# Altium PCB waku-ctl.PcbDoc (part 1 of 5)
Units mil, origin at the board's own origin, x right, y up, seen from the top; angles counter-clockwise.
Board outline 3530 x 2610 mil, 2 copper layers (Top Layer, Bottom Layer); 84 components, 84 nets, 358 pads, 106 vias.
Unrouted connection lines stored in the file: 42.
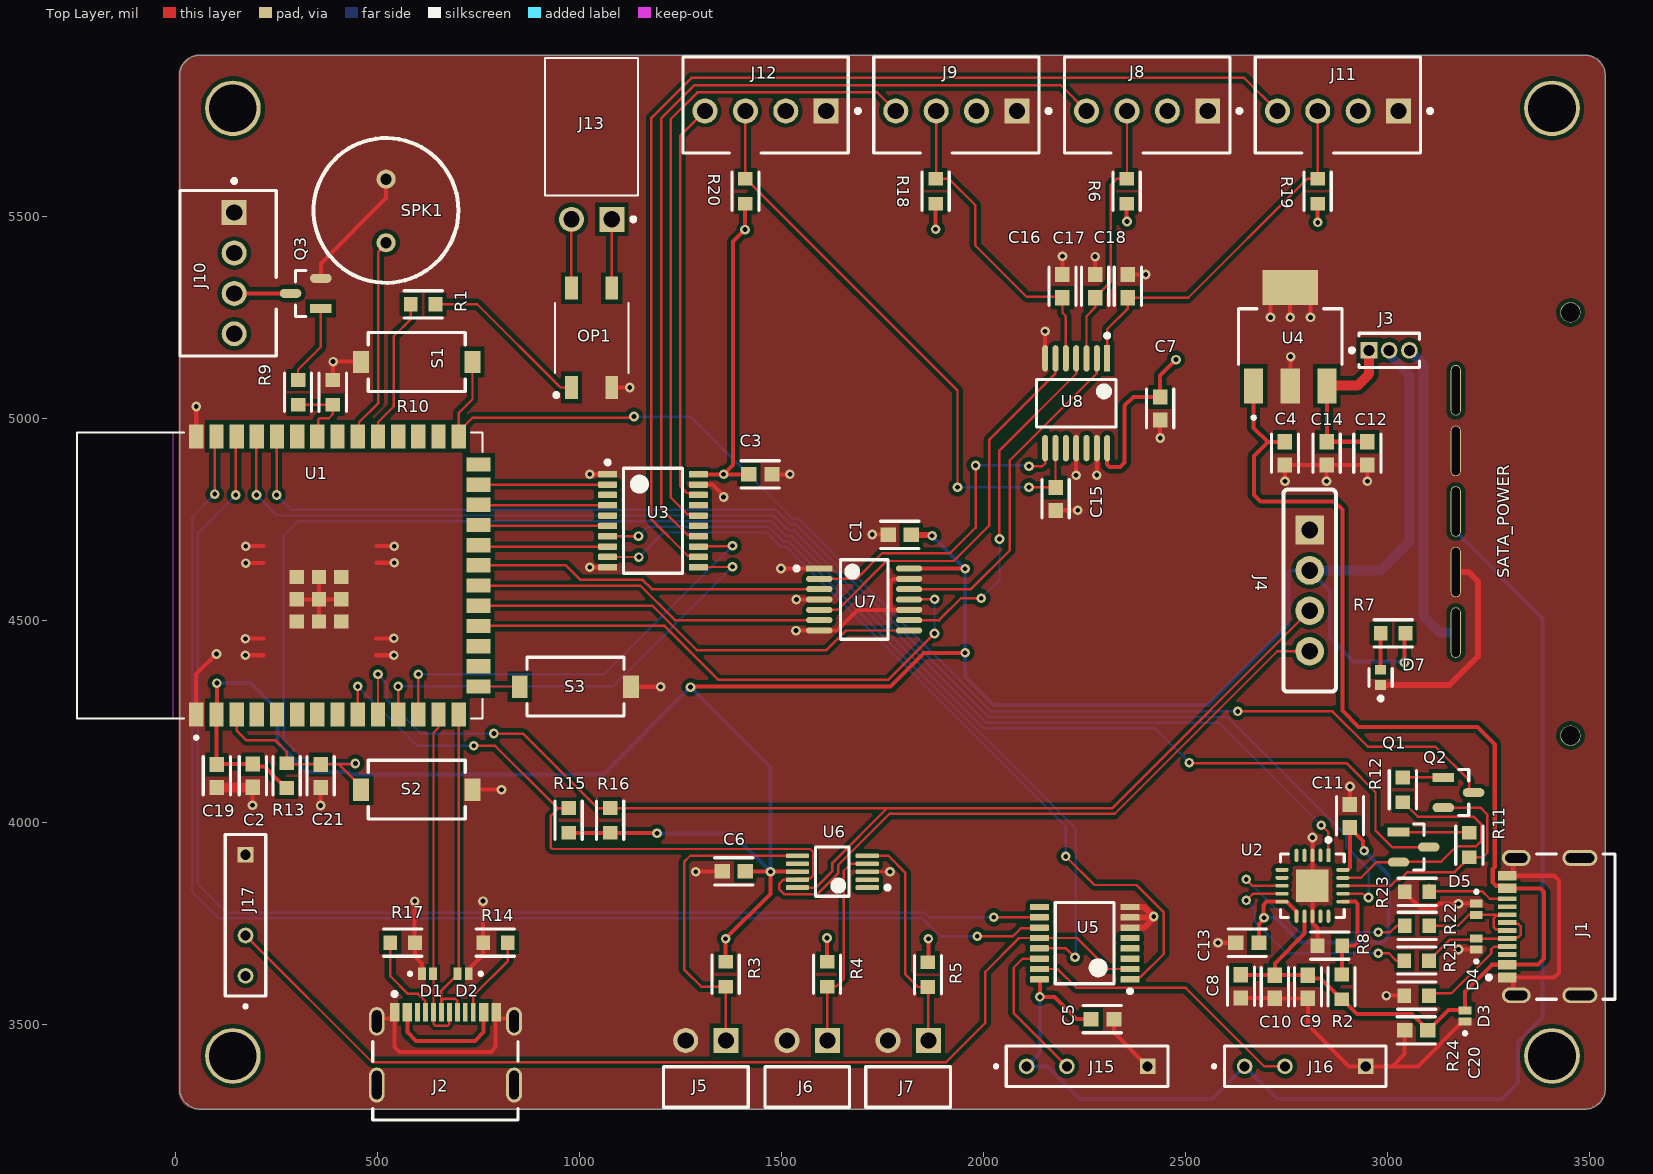
[diagram p0: Top Layer view]
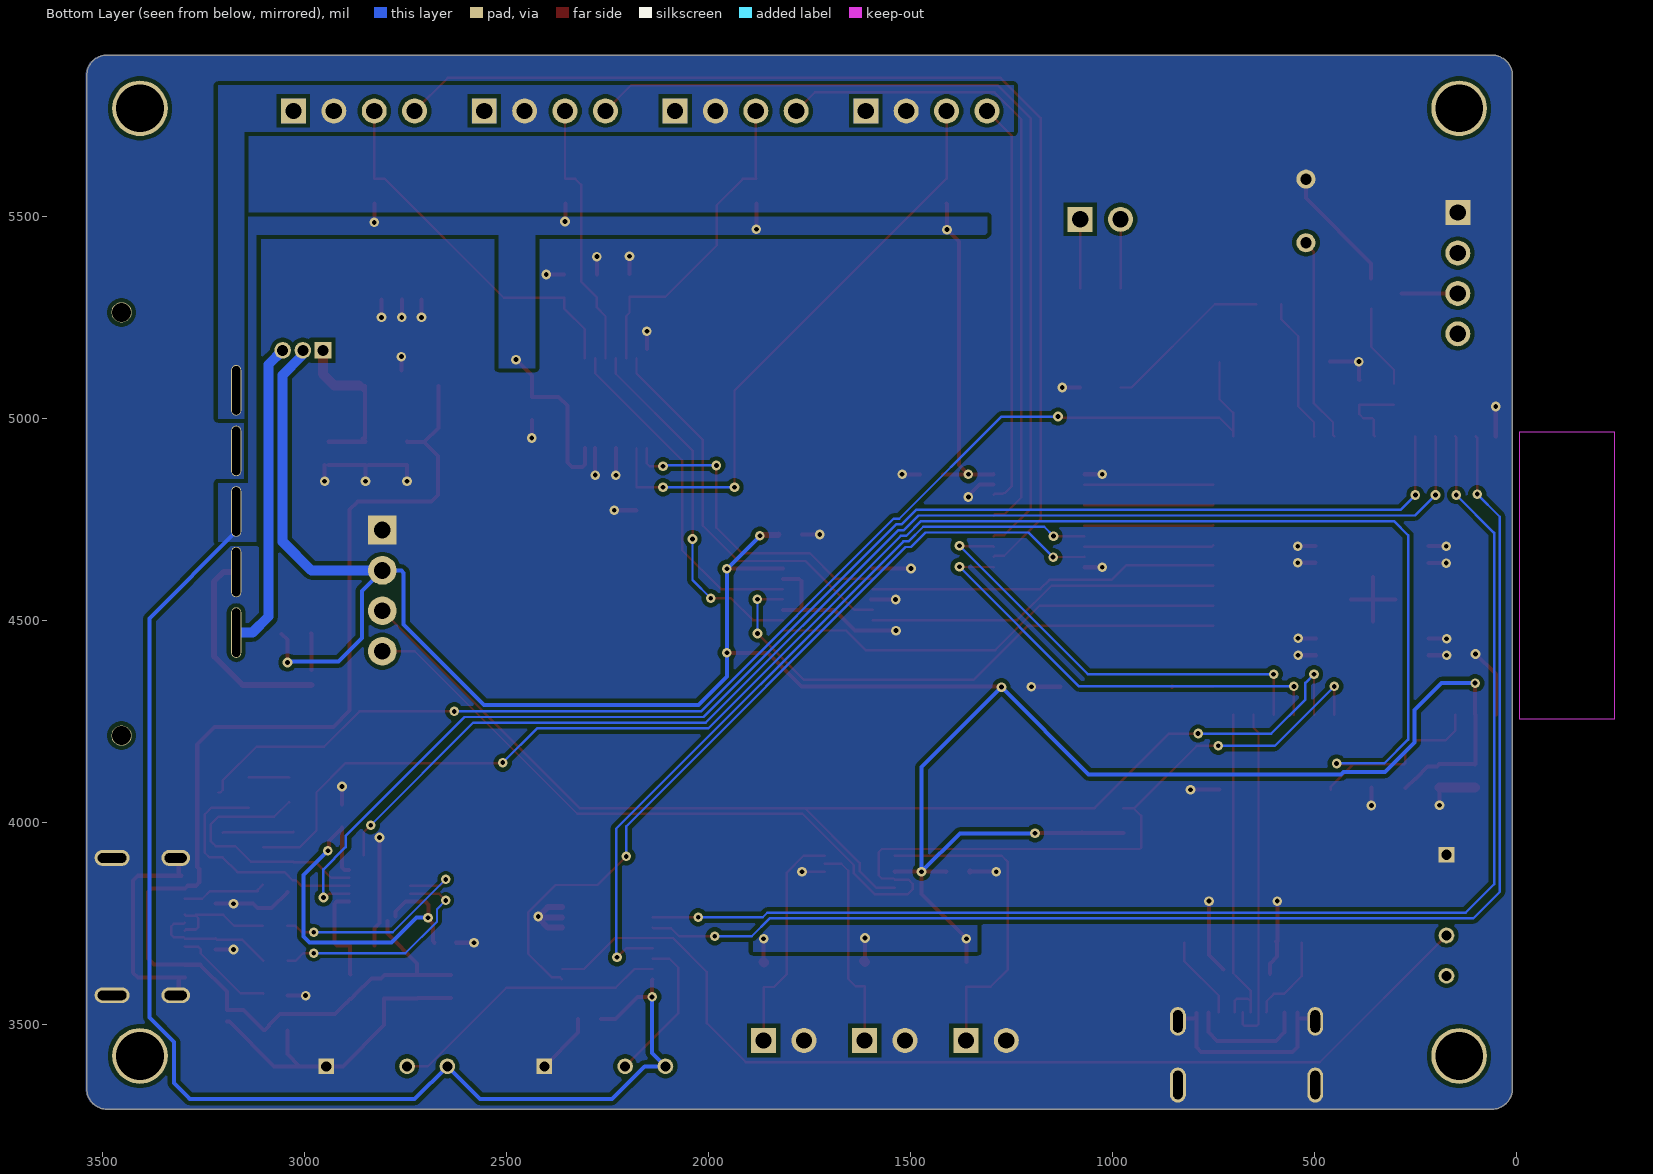
[diagram p1: Bottom Layer view, seen from below]
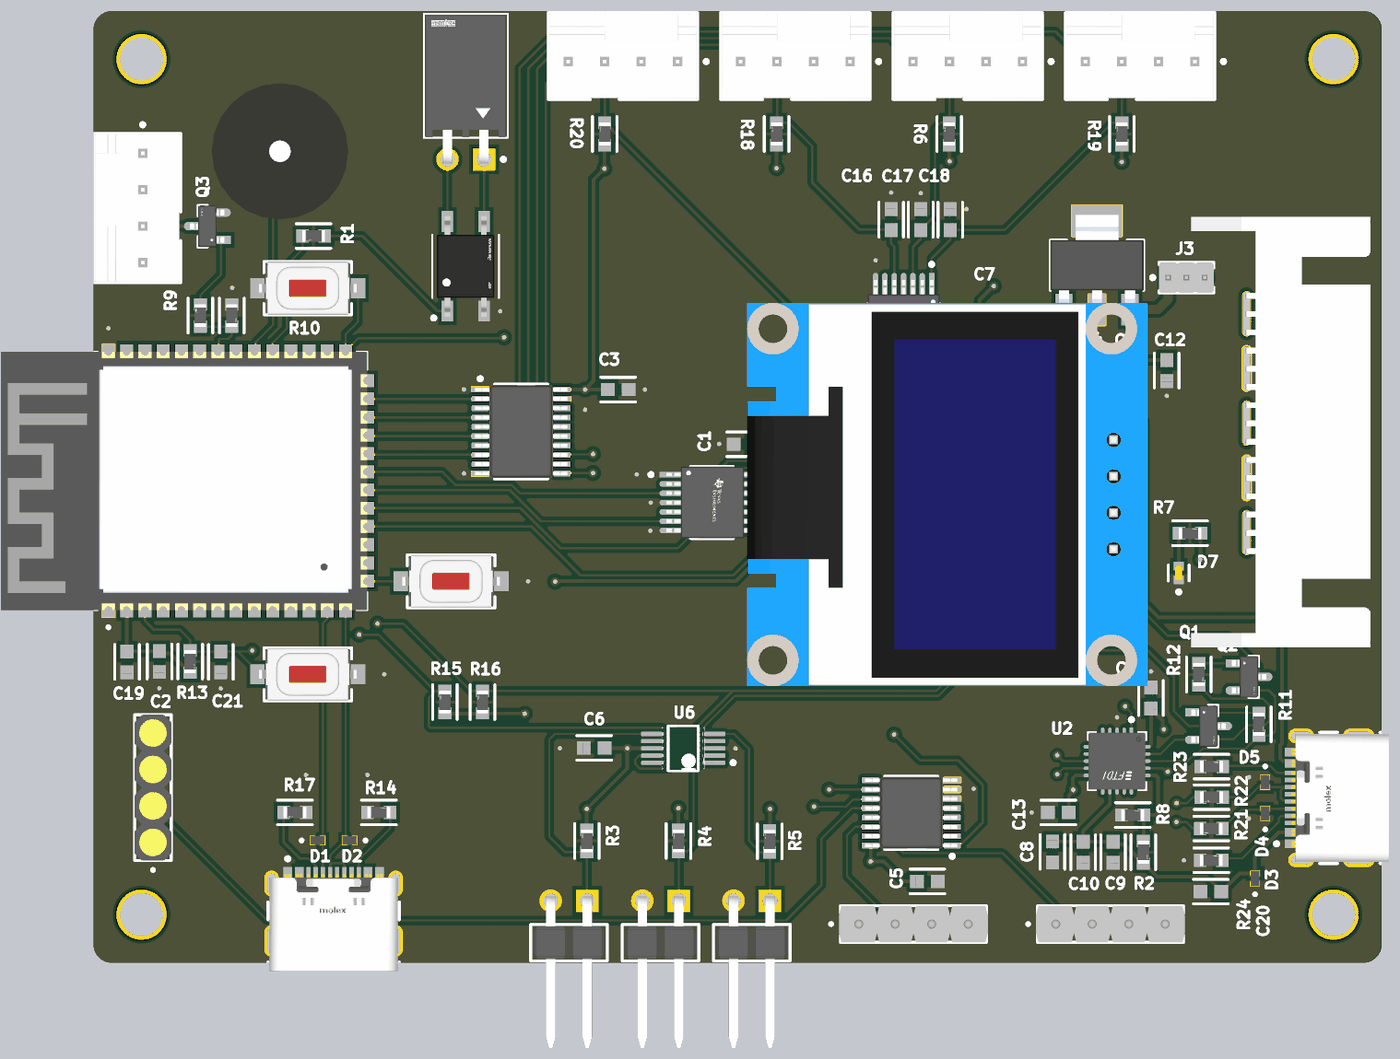
[diagram p3: 3D render of the assembled board from above, using the file's embedded part models]

## Layer stack, top to bottom
Top Solder: solder mask 0.4, Solder Resist, Dk 3.5
Top Layer: signal copper 1.4
Dielectric 1: dielectric 12.6, FR-4, Dk 4.8
Bottom Layer: signal copper 1.4
Bottom Solder: solder mask 0.4, Solder Resist, Dk 3.5

## Board outline
10,3340 ccw(c60,3340) 60,3290 3490,3290 ccw(c3490,3340) 3540,3340 3540,5850 ccw(c3490,5850) 3490,5900 60,5900 ccw(c60,5850) 10,5850

## Design rules (kind name [scope] priority, off if disabled: settings)
Clearance DIFF90_Clearance [InDifferentialPairClass('DIFF90')] p1: gap=8 ignorepadtopadclearanceinfootprint=TRUE
Clearance [All] p2: gap=10 ignorepadtopadclearanceinfootprint=TRUE except(6: SMDPad-SMDPad; 8: Arc-Arc Arc-Track Arc-SMDPad Track-Track Track-SMDPad)
DiffPairsRouting DIFF90 [InDifferentialPairClass('DIFF90')] p1: maxlimit=8.1 minlimit=8 mostfreqgap=8 toplayer_minwidth=6.03 toplayer_maxwidth=6.23 toplayer_prefwidth=6.03 bottomlayer_minwidth=6.03 bottomlayer_maxwidth=6.23 bottomlayer_prefwidth=6.03 maxuncoupledlength=500
HoleSize [All] p1: absolutevalues=TRUE maxlimit=248.03 minlimit=5.91 maxpercent=80.000 minpercent=20.000
MinimumSolderMaskSliver 3PIN_EXCEPTION [InComponent('J3')] p1: minsoldermaskwidth=3.94
MinimumSolderMaskSliver [All] p2: minsoldermaskwidth=5.12
PlaneConnect [All] p1: pad.planeconnectstyle=Relief pad.reliefexpansion=20 pad.reliefentries=4 pad.reliefconductorwidth=20 pad.reliefairgap=10 via.planeconnectstyle=Direct via.reliefexpansion=20 via.reliefentries=4 via.reliefconductorwidth=10 via.reliefairgap=10
PolygonConnect [All] p1: connectstyle=Direct reliefconductorwidth=10 reliefentries=4 polygonreliefangle="90 Angle" airgapwidth=10
RoutingTopology RoutingTopology_1 [InNet('GND')] p1: topology=Starburst
RoutingTopology [All] p2: topology=Shortest
RoutingVias [All] p1: holewidth=12 width=24 viastyle="Through Hole" minholewidth=12 minwidth=24 maxholewidth=12 maxwidth=24
SilkToSolderMaskClearance [IsPad] p1: minsilkscreentomaskgap=7 clearancetoexposedcopper=TRUE
SolderMaskExpansion [All] p1: expansion=2 istentingtop=FALSE
SupplyNets "Schematic Supply Nets_6" [InNet('+3V3_EXT')] p1: voltage=0.000
SupplyNets "Schematic Supply Nets_5" [InNet('+3V3_REG')] p2: voltage=0.000
SupplyNets "Schematic Supply Nets_2" [InNet('GND')] p3: voltage=0.000
SupplyNets "Schematic Supply Nets_4" [InNet('+5_VBUS1')] p4: voltage=0.000
SupplyNets "Schematic Supply Nets_3" [InNet('+12')] p5: voltage=0.000
SupplyNets "Schematic Supply Nets_1" [InNet('+5')] p6: voltage=0.000
SupplyNets "Schematic Supply Nets" [InNet('+3V3')] p7: voltage=0.000
Width [All] p1: maxlimit=100 minlimit=6 preferedwidth=10 minimp=50.000000 maximp=50.000000 favimp=50.000000
24 further rules are at their usual default settings.

## Classes and differential pairs
differential pair class DIFF90: CON1_USB CON2_USB FDTI_USB
differential pair FDTI_USB: +FDTI_USB_P -FDTI_USB_N
differential pair CON1_USB: +CON1_USB_P -CON1_USB_N
differential pair CON2_USB: +CON2_USB_P -CON2_USB_N

## Components (designator, comment, footprint, x,y, rotation, side; value= is the part's Value field where it differs from the comment)
C1 "100nF" SAM_SMD_CAP_CL_0603 1793,4712 r0 top
C2 "10uF" SAM_SMD_CAP_CL_0603 191,4116 r270 top value=10µF
C3 "100nF" SAM_SMD_CAP_CL_0603 1448,4862 r0 top
C4 "4.7uF" SAM_SMD_CAP_CL_0603 2747,4914 r90 top value=4.7µF
C5 "100nF" SAM_SMD_CAP_CL_0603 2295,3513 r0 top
C6 "100nF" SAM_SMD_CAP_CL_0603 1382,3879 r0 top
C7 "100nF" SAM_SMD_CAP_CL_0603 2438,5025 r90 top
C8 "100nF" SAM_SMD_CAP_CL_0603 2638,3594 r90 top
C9 "100nF" SAM_SMD_CAP_CL_0603 2804,3593 r90 top
C10 "100nF" SAM_SMD_CAP_CL_0603 2722,3593 r90 top
C11 "100nF" SAM_SMD_CAP_CL_0603 2908,4016 r270 top
C12 "1uF" SAM_SMD_CAP_CL_0603 2951,4914 r90 top value=1µF
C13 "100nF" SAM_SMD_CAP_CL_0603 2654,3702 r0 top
C14 "1uF" SAM_SMD_CAP_CL_0603 2850,4914 r90 top value=1µF
C15 "1nF" SAM_SMD_CAP_CL_0603 2179,4801 r270 top
C16 "1nF" SAM_SMD_CAP_CL_0603 2196,5328 r90 top
C17 "1nF" SAM_SMD_CAP_CL_0603 2277,5328 r90 top
C18 "1nF" SAM_SMD_CAP_CL_0603 2358,5328 r90 top
C19 "100nF" SAM_SMD_CAP_CL_0603 102,4115 r90 top
C20 "100nF" SAM_SMD_CAP_CL_0603 3072,3485 r0 top
C21 "1uF" SAM_SMD_CAP_CL_0603 359,4115 r90 top value=1µF
D1 "SP3022-01ETG" SP3022-01ETG 623.78,3625.22 r0 top
D2 "SP3022-01ETG" SP3022-01ETG 712,3625.22 r180 top
D3 "SP3022-01ETG" SP3022-01ETG 3193,3521 r90 top
D4 "SP3022-01ETG" SP3022-01ETG 3221,3699 r90 top
D5 "SP3022-01ETG" SP3022-01ETG 3221,3785 r270 top
D7 "GREEN" VLMG1500-GS08 2984,4359 r90 top
J1 "217179-0001" 217179-0001 3432,3742 r90 top
J2 "217179-0001" 217179-0001 668.08,3394.98 r0 top
J3 "GRPB031VWVN-RC" GRPB031VWVN-RC 3005,5169 r0 top
J4 "i2c OLED" HS-HS96L03W2C03-OLED 2808,4724 r270 top
J5 "2 PIN HEADER 2.54" 22-28-8020 1313,3344.84 r180 top
J6 "2 PIN HEADER 2.54" 22-28-8020 1564,3344.84 r180 top
J7 "2 PIN HEADER 2.54" 22-28-8020 1814,3344.84 r180 top
J8 "4 PIN HEADER 2.54" 47053-1000 2405.76,5776.72 r0 top
J9 "4 PIN HEADER 2.54" 47053-1000 1933.32,5776.72 r0 top
J10 "4 PIN HEADER 2.54" 47053-1000 130,5360 r90 top
J11 "4 PIN HEADER 2.54" 47053-1000 2878.2,5776.72 r0 top
J12 "4 PIN HEADER 2.54" 47053-1000 1460.88,5776.72 r0 top
J13 "2PIN PWR" SSQ-102-02-T-S-RA 1030,5720 r0 top
J15 "TS-104-T-AA" TS-104-T-AA 2257,3396 r0 top
J16 "TS-104-T-AA" TS-104-T-AA 2797,3396 r0 top
J17 "SMC-1-04-1-GT" SMC-1-04-1-GT 173,3770 r90 top
OP1 "PS2701A" PS2701A-1-F3-A 1030,5200 r90 top
Q1 "SS8050-G" SS8050-G 3065.58,3939 r0 top
Q2 "SS8050-G" SS8050-G 3176.58,4074 r0 top
Q3 "SS8050-G" SS8050-G 322,5310 r180 top
R1 "330" YAG_SMD_RES_RC_0603 613,5283 r180 top value=47µF
R2 "4.7K" YAG_SMD_RES_RC_0603 2887,3593 r270 top value=4.7kΩ
R3 "10K" YAG_SMD_RES_RC_0603 1362,3624 r90 top value=10kΩ
R4 "10K" YAG_SMD_RES_RC_0603 1613,3624 r90 top value=10kΩ
R5 "10K" YAG_SMD_RES_RC_0603 1863,3623 r90 top value=10kΩ
R6 "10K" YAG_SMD_RES_RC_0603 2355,5563 r90 top value=10kΩ
R7 "1K" YAG_SMD_RES_RC_0603 3015,4468 r0 top value=1kΩ
R8 "10K" YAG_SMD_RES_RC_0603 2858,3695 r0 top value=10kΩ
R9 "1K" YAG_SMD_RES_RC_0603 303,5065 r90 top value=1kΩ
R10 "10K" YAG_SMD_RES_RC_0603 389,5065 r270 top value=10kΩ
R11 "10K" YAG_SMD_RES_RC_0603 3203.58,3944 r270 top value=10kΩ
R12 "10K" YAG_SMD_RES_RC_0603 3039,4080.6 r270 top value=10kΩ
R13 "10K" YAG_SMD_RES_RC_0603 275,4116 r270 top value=10kΩ
R14 "5.1K" YAG_SMD_RES_RC_0603 792,3702.22 r0 top value=5.1kΩ
R15 "10K" YAG_SMD_RES_RC_0603 973,4005 r90 top value=10kΩ
R16 "10K" YAG_SMD_RES_RC_0603 1076,4005 r90 top value=10kΩ
R17 "5.1K" YAG_SMD_RES_RC_0603 562,3702.22 r180 top value=5.1kΩ
R18 "10K" YAG_SMD_RES_RC_0603 1882,5563 r90 top value=10kΩ
R19 "10K" YAG_SMD_RES_RC_0603 2828,5563 r90 top value=10kΩ
R20 "10K" YAG_SMD_RES_RC_0603 1411,5563 r90 top value=10kΩ
R21 "27" YAG_SMD_RES_RC_0603 3073,3658 r180 top value=27Ω
R22 "27" YAG_SMD_RES_RC_0603 3074,3744 r180 top value=27Ω
R23 "5.1K" YAG_SMD_RES_RC_0603 3074,3828 r0 top value=5.1kΩ
R24 "5.1K" YAG_SMD_RES_RC_0603 3073,3571 r0 top value=5.1kΩ
S1 "PTS636SMG25JSMTRLFS" PTS636SMG25JSMTRLFS 597.2,5140 r0 top
S2 "PTS636SMG25JSMTRLFS" PTS636SMG25JSMTRLFS 597.2,4081 r180 top
S3 "PTS636SMG25JSMTRLFS" PTS636SMG25JSMTRLFS 990,4336 r180 top
SATA_POWER "SATA 15 pin power connector" SATA_15PIN_POWER 3170,4770 r270 top
SPK1 "ALI_PASS_SPKR" HC9042-16 521,5435.52 r90 top
U1 "ESP32-S3-WROOM-1-N8R8" ESP32-S3-WROOM-1 258.03,4611.5 r90 top
U2 "FT231XQ-R" FT231XQ-R 2815,3843 r270 top
U3 "SN74AHCT244PWR" SN74AHCT244PWR 1182,4747 r0 top
U4 "AP7361C-33E-13" AP7361C-33E-13 2755,5198 r270 top
U5 "CD74HCT4053PWR" CD74HCT4053PWR 2251,3701 r180 top value=130Ω
U6 "ADS1115IDGSR" ADS1115IDGSR 1626,3878 r180 top
U7 "SN74LVC125APWR" SN74LVC125APWR 1705,4552 r0 top
U8 "SN74HC14PWR" SN74HC14PWR 2230,5038 r270 top

## Footprints (in the part's own frame and the unit in brackets; to place one, negate y for a bottom-side part, rotate by r counter-clockwise, add the part's x,y. Pads: shape width x height; smd on the part's side, far side on the other; paste and mask are expansions set on the pad)
22-28-8020 [mm]
  rect 1.57x1.57 hole 1.02 paste-2539.97 mask+0: 1(-1.27,-2.925)
  round 1.57 hole 1.02 paste-2539.97 mask+0: 2(1.27,-2.925)
  silkscreen extent -2.66,-1.27 2.67,1.27, body extent -2.77,-3.81 2.77,7.95, height 0.25
47053-1000 [mm]
  rect 1.57x1.57 hole 1.02 paste-2539.97 mask+0: 1(3.81,-0.38)
  round 1.57 hole 1.02 paste-2539.97 mask+0: 2(1.27,-0.38) 3(-1.27,-0.38) 4(-3.81,-0.38)
  silkscreen extent -5.2,-3.02 5.93,3.02, body extent -5.3,-3.26 5.3,3.12, height 0.25
217179-0001 [mm]
  rect 0.6x1.15 smd paste+0 mask+0: A1B12(-3.2,3.425) A4B9(-2.4,3.425) B1A12(3.2,3.425) B4A9(2.4,3.425)
  rect 0.3x1.15 smd paste+0 mask+0: A5(-1.25,3.425) A6(-0.25,3.425) A7(0.25,3.425) A8(1.25,3.425) B5(1.75,3.425) B6(0.75,3.425) B7(-0.75,3.425) B8(-1.75,3.425)
  rrect100% 1x1.8 hole 1.4 slot 0.6 at 0 deg paste-2539.97 mask+0: S1(-4.32,2.85) S2(4.32,2.85)
  rrect100% 1x2.2 hole 1.8 slot 0.6 at 0 deg paste-2539.97 mask+0: S3(-4.32,-1.15) S4(4.32,-1.15)
  silkscreen extent -4.57,-3.35 4.57,4.7, body extent -4.92,-3.45 4.92,4.1, height 0.25
ADS1115IDGSR [mm]
  rrect33% 1.45x0.3 smd paste+0 mask+0: 1(-2.2,1) 2(-2.2,0.5) 3(-2.2,0) 4(-2.2,-0.5) 5(-2.2,-1) 6(2.2,-1) 7(2.2,-0.5) 8(2.2,0) 9(2.2,0.5) 10(2.2,1)
  silkscreen extent -3.6,-1.55 1.05,1.55, body extent -3.03,-1.8 3.03,1.8, height 0.25
AP7361C-33E-13 [mm] "SOT223, 4-Leads, Body 6.7x3.7mm, Pitch 2.3mm, IPC Medium Density"
  rect 2.2x1.2 smd: 1(2.973,-2.173) 2(2.973,0.127) 3(2.973,2.427)
  rect 2.2x3.5 smd: 4(-3.227,0.127)
  silkscreen extent -1.88,-3.12 5.07,3.38, body extent -3.63,-3.12 3.37,3.38, height 1.65
CD74HCT4053PWR [mm] "SOP, 16-Leads, Body 5.1x4.5mm, Pitch 0.65mm, IPC High Density"
  rrect25% 1.2x0.4 smd: 1(-2.85,2.275) 2(-2.85,1.625) 3(-2.85,0.975) 4(-2.85,0.325) 5(-2.85,-0.325) 6(-2.85,-0.975) 7(-2.85,-1.625) 8(-2.85,-2.275) 9(2.85,-2.275) 10(2.85,-1.625) 11(2.85,-0.975) 12(2.85,-0.325) 13(2.85,0.325) 14(2.85,0.975) 15(2.85,1.625) 16(2.85,2.275)
  silkscreen extent -2.98,-2.55 1.85,3.15, body extent -3.21,-2.5 3.21,2.5, height 1
ESP32-S3-WROOM-1 [mm]
  rect 1.5x0.9 smd: 1(-8.75,5.26) 2(-8.75,3.99) 3(-8.75,2.72) 4(-8.75,1.45) 5(-8.75,0.18) 6(-8.75,-1.09) 7(-8.75,-2.36) 8(-8.75,-3.63) 9(-8.75,-4.9) 10(-8.75,-6.17) 11(-8.75,-7.44) 12(-8.75,-8.71) 13(-8.75,-9.98) 14(-8.75,-11.25) 27(8.75,-11.25) 28(8.75,-9.98) 29(8.75,-8.71) 30(8.75,-7.44) 31(8.75,-6.17) 32(8.75,-4.9) 33(8.75,-3.63) 34(8.75,-2.36) 35(8.75,-1.09) 36(8.75,0.18) 37(8.75,1.45) 38(8.75,2.72) 39(8.75,3.99) 40(8.75,5.26)
  rect 0.9x1.5 smd: 15(-6.985,-12.5) 16(-5.715,-12.5) 17(-4.445,-12.5) 18(-3.175,-12.5) 19(-1.905,-12.5) 20(-0.635,-12.5) 21(0.635,-12.5) 22(1.905,-12.5) 23(3.175,-12.5) 24(4.445,-12.5) 25(5.715,-12.5) 26(6.985,-12.5)
  rect 0.9x0.9 smd: 41(-1.5,-2.46) 42(-2.9,-2.46) 43(-0.1,-2.46) 44(-2.9,-3.86) 45(-1.5,-3.86) 46(-0.1,-3.86) 47(-2.9,-1.06) 48(-1.5,-1.06) 49(-0.1,-1.06)
  Keep-Out Layer region: 9,6.75 -9,6.75 -9,12.75 9,12.75
  Keep-Out Layer region: 9,6.75 -9,6.75 -9,12.75 9,12.75
  silkscreen extent -10.3,-12.75 9,12.75, body extent -9,-12.75 9,12.75, height 3.25
FT231XQ-R [mm]
  rect 0.84x0.242 smd paste+0 mask+0: 1(-1.916,1)
  rrect100% 0.84x0.242 smd paste+0 mask+0: 2(-1.916,0.5) 3(-1.916,0) 4(-1.916,-0.5) 5(-1.916,-1) 11(1.916,-1) 12(1.916,-0.5) 13(1.916,0) 14(1.916,0.5) 15(1.916,1)
  rrect100% 0.242x0.84 smd paste+0 mask+0: 6(-1,-1.916) 7(-0.5,-1.916) 8(0,-1.916) 9(0.5,-1.916) 10(1,-1.916) 16(1,1.916) 17(0.5,1.916) 18(0,1.916) 19(-0.5,1.916) 20(-1,1.916)
  rect 2.05x2.05 smd paste-1000 mask+0: 21(0,0)
  silkscreen extent -3.01,-2 2,2, body extent -2,-2 2,2, height 0.8
GRPB031VWVN-RC [mm] "Header, 3-Leads, Body 3.81x2.14mm, Pitch 1.27mm"
  rect 1.05x1.05 hole 0.7: 1(-1.27,0)
  round 1.05 hole 0.7: 2(0,0) 3(1.27,0)
  silkscreen extent -2.47,-1.07 1.91,1.07, body extent -1.9,-1.07 1.91,1.07, height 4
HC9042-16 [mm]
  round 1.2 hole 0.711: 1(0,0) 2(4,0)
  silkscreen extent -2.52,-4.55 6.58,4.55, body extent -2.72,-4.75 6.78,4.75, height 5
HS-HS96L03W2C03-OLED [mm]
  rect 1.8x1.8 hole 1.05 paste-2539.97 mask+0.05: 1(0,0)
  round 1.8 hole 1.05 paste-2539.97 mask+0.05: 2(2.54,0) 3(5.08,0) 4(7.62,0)
  silkscreen extent -2.54,-1.65 10.16,1.65, body extent -9.54,-25.57 17.16,2.29, height 5.03
PS2701A-1-F3-A [mm] "Recommended Land Pattern"
  rect 1.45x0.8 smd paste+0 mask+0: 1(-3.125,1.27) 2(-3.125,-1.27) 3(3.125,-1.27) 4(3.125,1.27)
  silkscreen extent -3.72,-2.31 2.2,2.35, body extent -3.5,-2 3.5,2, height 2.3
PTS636SMG25JSMTRLFS [mm]
  rect 1x1.4 smd paste+0 mask+0: 1(-3.5,0) 2(3.5,0)
  silkscreen extent -3.05,-1.85 3.05,1.85, body extent -4.1,-1.95 4.1,1.95, height 0.25
SAM_SMD_CAP_CL_0603 [mil]
  rect 37.72x35.91 smd paste+0 mask+0: 1(-28.62,0) 2(28.62,0)
  silkscreen extent -47,-34 47,34, body extent -31,-16 31,16, height 36
SATA_15PIN_POWER [mil]
  oval 125x25 hole 20 slot 120 at 0 deg: 3V3(300,0) 5V(0,0) 12v(-300,0) GND-1(-150,0) GND-2(150,0)
  round 50 hole 47.24 unplated: DH1(-493,284) DH1(555,284)
  body extent -566,-152 616,340, height 173
SMC-1-04-1-GT [mm]
  round 0.985 hole 0.635: 01(-3.81,0) 02(-1.27,0)
  rect 0.985x0.985 hole 0.635: 04(3.81,0)
  silkscreen extent -5.83,-1.27 5.08,1.27, body extent -5.08,-1.27 5.08,1.27, height 4.28
SN74AHCT244PWR [mm] "SOP, 20-Leads, Body 6.6x4.5mm, Pitch 0.65mm, IPC High Density"
  rrect25% 1.2x0.4 smd: 1(-2.85,2.925) 2(-2.85,2.275) 3(-2.85,1.625) 4(-2.85,0.975) 5(-2.85,0.325) 6(-2.85,-0.325) 7(-2.85,-0.975) 8(-2.85,-1.625) 9(-2.85,-2.275) 10(-2.85,-2.925) 11(2.85,-2.925) 12(2.85,-2.275) 13(2.85,-1.625) 14(2.85,-0.975) 15(2.85,-0.325) 16(2.85,0.325) 17(2.85,0.975) 18(2.85,1.625) 19(2.85,2.275) 20(2.85,2.925)
  silkscreen extent -2.97,-3.3 1.85,3.8, body extent -3.21,-3.25 3.21,3.25, height 1
SN74HC14PWR [mm]
  rect 1.655x0.381 smd paste+0 mask+0: 1(-2.825,1.95)
  rrect100% 1.655x0.381 smd paste+0 mask+0: 2(-2.825,1.3) 3(-2.825,0.65) 4(-2.825,0) 5(-2.825,-0.65) 6(-2.825,-1.3) 7(-2.825,-1.95) 8(2.825,-1.95) 9(2.825,-1.3) 10(2.825,-0.65) 11(2.825,0) 12(2.825,0.65) 13(2.825,1.3) 14(2.825,1.95)
  silkscreen extent -4.37,-2.5 1.5,2.5, body extent -3.9,-2.75 3.9,2.75, height 0.25
SN74LVC125APWR [mm]
  rect 1.655x0.381 smd paste+0 mask+0: 1(-2.825,1.95)
  rrect100% 1.655x0.381 smd paste+0 mask+0: 2(-2.825,1.3) 3(-2.825,0.65) 4(-2.825,0) 5(-2.825,-0.65) 6(-2.825,-1.3) 7(-2.825,-1.95) 8(2.825,-1.95) 9(2.825,-1.3) 10(2.825,-0.65) 11(2.825,0) 12(2.825,0.65) 13(2.825,1.3) 14(2.825,1.95)
  silkscreen extent -4.37,-2.5 1.5,2.5, body extent -3.9,-2.75 3.9,2.75, height 0.25
SP3022-01ETG [mm]
  rect 0.5x0.8 smd paste-0.1 mask+0: 1(-0.35,0) 2(0.35,0)
  silkscreen extent -1.2,-0.1 -1,0.1, body extent -0.5,-0.3 0.5,0.3, height 0.5
SS8050-G [mm]
  rect 1.357x0.572 smd paste+0 mask+0: 1(-0.951,0.95)
  rrect100% 1.357x0.572 smd paste+0 mask+0: 2(-0.951,-0.95) 3(0.951,0)
  silkscreen extent 0,-1.45 0.65,1.45, body extent -1.21,-1.45 1.21,1.45, height 1.15
SSQ-102-02-T-S-RA [mm] "Recommended Land Pattern"
  rect 1.57x1.57 hole 1.02: 1(1.27,-5.755)
  round 1.57 hole 1.02: 2(-1.27,-5.755)
  silkscreen extent -2.92,-5.88 2.92,4.39, body extent -3.02,-6.64 3.02,4.48, height 0.25
TS-104-T-AA [mm]
  round 0.985 hole 0.635: 01(-3.81,0) 02(-1.27,0)
  rect 0.985x0.985 hole 0.635: 04(3.81,0)
  silkscreen extent -5.83,-1.27 5.08,1.27, body extent -5.18,-1.27 5.18,1.27, height 8.28
VLMG1500-GS08 [mm]
  rect 0.6x0.7 smd paste+0 mask+0: 1(-0.475,0) 2(0.475,0)
  silkscreen extent -1.45,-0.73 0.55,0.73, body extent -0.87,-0.45 0.87,0.45, height 0.25
YAG_SMD_RES_RC_0603 [mil]
  rect 33.81x35.91 smd paste+0 mask+0: 1(-30.58,0) 2(30.58,0)
  silkscreen extent -47,-34 47,34, body extent -31,-16 31,16, height 22

## Part data
C1 C3 C5 C6 C7 C8 C9 C10 C11 C13 C19 C20: library part CL10B104KB8NNNC, "CAP CER 0.1UF 50V X7R 0603", Case Code (Imperial)=0603, Case Code (Metric)=1608, Dielectric=X7R, Dielectric Material=Ceramic, LCSC Part Number=C1591, Manufacturer="Samsung Electro-Mechanics", Max Operating Temperature=125°C, Min Operating Temperature=-55°C, Supplier Part Number=1276-1000-6-ND, Tolerance=10%, Voltage=50V, Case/Package=0603, Category="Ceramic Capacitors", China RoHS=Compliant, ComponentLink1Description=https://datasheet.octopart.com:443/CL10B104KB8NNNC-Samsung-datasheet-165517828.pdf?src-supplier=Upverter, ComponentLink1URL=https://datasheet.octopart.com:443/CL10B104KB8NNNC-Samsung-datasheet-165517828.pdf?src-supplier=Upverter, ComponentLink2Description=https://datasheet.octopart.com:443/CL10B104KB8NNNC-Samsung-Electro-Mechanics-datasheet-116890969.pdf?src-supplier=Upverter, ComponentLink2URL=https://datasheet.octopart.com:443/CL10B104KB8NNNC-Samsung-Electro-Mechanics-datasheet-116890969.pdf?src-supplier=Upverter, ComponentLink3Description=https://datasheet.octopart.com:443/CL10B104KB8NNNC-Samsung-Electro-Mechanics-datasheet-81461840.pdf?src-supplier=Upverter, ComponentLink3URL=https://datasheet.octopart.com:443/CL10B104KB8NNNC-Samsung-Electro-Mechanics-datasheet-81461840.pdf?src-supplier=Upverter, ComponentLink4Description=https://datasheet.octopart.com:443/CL10B104KB8NNNC-Samsung-Electro-Mechanics-datasheet-181551448.pdf?src-supplier=Newark, ComponentLink4URL=https://datasheet.octopart.com:443/CL10B104KB8NNNC-Samsung-Electro-Mechanics-datasheet-181551448.pdf?src-supplier=Newark, ComponentLink5Description=https://datasheet.octopart.com:443/CL10B104KB8NNNC-Samsung-Electro-Mechanics-datasheet-181551449.pdf?src-supplier=Newark, ComponentLink5URL=https://datasheet.octopart.com:443/CL10B104KB8NNNC-Samsung-Electro-Mechanics-datasheet-181551449.pdf?src-supplier=Newark, ComponentLink6Description=https://datasheet.octopart.com/CL10B104KB8NNNC-Samsung-Electro-Mechanics-datasheet-8324245.pdf, ComponentLink6URL=https://datasheet.octopart.com/CL10B104KB8NNNC-Samsung-Electro-Mechanics-datasheet-8324245.pdf, ComponentLink7Description=https://datasheet.octopart.com/CL10B104KB8NNNC-Samsung-Electro-Mechanics-datasheet-97040617.pdf, ComponentLink7URL=https://datasheet.octopart.com/CL10B104KB8NNNC-Samsung-Electro-Mechanics-datasheet-97040617.pdf, ComponentLink8Description=https://datasheet.octopart.com/General-Multilayer-Ceramic-Capacitors-Samsung-datasheet-family-111.pdf, ComponentLink8URL=https://datasheet.octopart.com/General-Multilayer-Ceramic-Capacitors-Samsung-datasheet-family-111.pdf, ComponentLink9Description=https://datasheet.octopart.com:443/CL10B104KB8NNNC-Samsung-Electro-Mechanics-datasheet-136482302.pdf?src-supplier=Samsung+SCT, ComponentLink9URL=https://datasheet.octopart.com:443/CL10B104KB8NNNC-Samsung-Electro-Mechanics-datasheet-136482302.pdf?src-supplier=Samsung+SCT, ComponentLink10Description=https://datasheet.octopart.com:443/CL10B104KB8NNNC-Samsung-datasheet-42770373.pdf?src-supplier=Future+Electronics, ComponentLink10URL=https://datasheet.octopart.com:443/CL10B104KB8NNNC-Samsung-datasheet-42770373.pdf?src-supplier=Future+Electronics, ComponentLink11Description=https://datasheet.octopart.com:443/CL10B104KB8NNNC-Samsung-datasheet-26589154.pdf?src-supplier=Future+Electronics, ComponentLink11URL=https://datasheet.octopart.com:443/CL10B104KB8NNNC-Samsung-datasheet-26589154.pdf?src-supplier=Future+Electronics, ComponentLink12Description=https://datasheet.octopart.com:443/CL10B104KB8NNNC-Samsung-Electro-Mechanics-datasheet-149136784.pdf?src-supplier=Future+Electronics, ComponentLink12URL=https://datasheet.octopart.com:443/CL10B104KB8NNNC-Samsung-Electro-Mechanics-datasheet-149136784.pdf?src-supplier=Future+Electronics, ComponentLink13Description=https://datasheet.octopart.com:443/CL10B104KB8NNNC-Samsung-datasheet-22147433.pdf?src-supplier=TME, ComponentLink13URL=https://datasheet.octopart.com:443/CL10B104KB8NNNC-Samsung-datasheet-22147433.pdf?src-supplier=TME, ComponentLink14Description=https://datasheet.octopart.com:443/CL10B104KB8NNNC-Samsung-Electro-Mechanics-datasheet-11837008.pdf?src-supplier=Arrow+Electronics, ComponentLink14URL=https://datasheet.octopart.com:443/CL10B104KB8NNNC-Samsung-Electro-Mechanics-datasheet-11837008.pdf?src-supplier=Arrow+Electronics, ComponentLink15Description=http://sigma.octopart.com:80/rohs_certificate/General-Multilayer-Ceramic-Capacitors-Samsung-family-110.pdf?src-supplier=Compliance+Statements, ComponentLink15URL=http://sigma.octopart.com:80/rohs_certificate/General-Multilayer-Ceramic-Capacitors-Samsung-family-110.pdf?src-supplier=Compliance+Statements, ComponentLink16Description=http://sigma.octopart.com:80/rohs_statement/General-Multilayer-Ceramic-Capacitors-Samsung-family-132.pdf?src-supplier=Compliance+Statements, ComponentLink16URL=http://sigma.octopart.com:80/rohs_statement/General-Multilayer-Ceramic-Capacitors-Samsung-family-132.pdf?src-supplier=Compliance+Statements, ComponentLink17Description=http://sigma.octopart.com:80/reach_statement/General-Multilayer-Ceramic-Capacitors-Samsung-family-133.pdf?src-supplier=Compliance+Statements, ComponentLink17URL=http://sigma.octopart.com:80/reach_statement/General-Multilayer-Ceramic-Capacitors-Samsung-family-133.pdf?src-supplier=Compliance+Statements, Contact Plating=Tin, Depth=800µm, Height=900µm, Lead Free="Lead Free", Length=1.6mm, Lifecycle Status=Production, Manufacturer Part Number=CL10B104KB8NNNC, Material=Ceramic, Mounting Technology="Surface Mount", Number of Terminals=2, Pricing="1=0.08, 10=0.004 (USD)", Radiation Hardening=No, REACH SVHC=Yes, RoHS=Compliant, Schedule B="8532240020, 8532240020|8532240020|8532240020|8532240020|8532240020|8532240020|8532240020|8532240020|8532240020|8532240020, 8532240020|8532240020|8532240020|8532240020|8532240020|8532240020|8532240020|8532240020|8532240020|8532240020|8532240020, 8532240020|8532240020|8532240020|8532240020|8532240020|8532240020|8532240020|8532240020|8532240020|8532240020|8532240020|8532240020", Stock=3849290, Supplier=DigiKey, Thickness=889µm, Voltage Rating=50V, Voltage Rating (DC)=50V, Width=800µm
C2: library part CL10A106KP8NNNC, "CAP CER 10UF 10V X5R 0603", Case Code (Imperial)=0603, Case Code (Metric)=1608, Dielectric=X5R, Dielectric Material=Ceramic, LCSC Part Number=C19702, Manufacturer="Samsung Electro-Mechanics", Max Operating Temperature=85°C, Min Operating Temperature=-55°C, Supplier Part Number=1276-1192-6-ND, Tolerance=10%, Voltage Rating=10V, Case/Package=0603, Category="Ceramic Capacitors", China RoHS=Compliant, ComponentLink1Description=https://datasheet.octopart.com:443/CL10A106KP8NNNC-Samsung-Electro-Mechanics-datasheet-181960519.pdf?src-supplier=IHS, ComponentLink1URL=https://datasheet.octopart.com:443/CL10A106KP8NNNC-Samsung-Electro-Mechanics-datasheet-181960519.pdf?src-supplier=IHS, ComponentLink2Description=https://datasheet.octopart.com/CL10A106KP8NNNC-Samsung-Electro-Mechanics-datasheet-8324245.pdf, ComponentLink2URL=https://datasheet.octopart.com/CL10A106KP8NNNC-Samsung-Electro-Mechanics-datasheet-8324245.pdf, ComponentLink3Description=https://datasheet.octopart.com/CL10A106KP8NNNC-Samsung-Electro-Mechanics-datasheet-97040617.pdf, ComponentLink3URL=https://datasheet.octopart.com/CL10A106KP8NNNC-Samsung-Electro-Mechanics-datasheet-97040617.pdf, ComponentLink4Description=https://datasheet.octopart.com:443/CL10A106KP8NNNC-Samsung-Electro-Mechanics-datasheet-136031754.pdf?src-supplier=Future+Electronics, ComponentLink4URL=https://datasheet.octopart.com:443/CL10A106KP8NNNC-Samsung-Electro-Mechanics-datasheet-136031754.pdf?src-supplier=Future+Electronics, ComponentLink5Description=https://datasheet.octopart.com:443/CL10A106KP8NNNC-Samsung-Electro-Mechanics-datasheet-110226289.pdf?src-supplier=Future+Electronics, ComponentLink5URL=https://datasheet.octopart.com:443/CL10A106KP8NNNC-Samsung-Electro-Mechanics-datasheet-110226289.pdf?src-supplier=Future+Electronics, ComponentLink6Description=https://datasheet.octopart.com:443/CL10A106KP8NNNC-Samsung-Electro-Mechanics-datasheet-81461787.pdf?src-supplier=Future+Electronics, ComponentLink6URL=https://datasheet.octopart.com:443/CL10A106KP8NNNC-Samsung-Electro-Mechanics-datasheet-81461787.pdf?src-supplier=Future+Electronics, ComponentLink7Description=https://datasheet.octopart.com:443/CL10A106KP8NNNC-Samsung-datasheet-48647232.pdf?src-supplier=Future+Electronics, ComponentLink7URL=https://datasheet.octopart.com:443/CL10A106KP8NNNC-Samsung-datasheet-48647232.pdf?src-supplier=Future+Electronics, ComponentLink8Description=https://datasheet.octopart.com:443/CL10A106KP8NNNC-Samsung-datasheet-34157262.pdf?src-supplier=Future+Electronics, ComponentLink8URL=https://datasheet.octopart.com:443/CL10A106KP8NNNC-Samsung-datasheet-34157262.pdf?src-supplier=Future+Electronics, ComponentLink9Description=https://datasheet.octopart.com:443/CL10A106KP8NNNC-Samsung-datasheet-26589120.pdf?src-supplier=Future+Electronics, ComponentLink9URL=https://datasheet.octopart.com:443/CL10A106KP8NNNC-Samsung-datasheet-26589120.pdf?src-supplier=Future+Electronics, ComponentLink10Description=https://datasheet.octopart.com:443/CL10A106KP8NNNC-Samsung-Electro-Mechanics-datasheet-149156481.pdf?src-supplier=Future+Electronics, ComponentLink10URL=https://datasheet.octopart.com:443/CL10A106KP8NNNC-Samsung-Electro-Mechanics-datasheet-149156481.pdf?src-supplier=Future+Electronics, ComponentLink11Description=https://datasheet.octopart.com:443/CL10A106KP8NNNC-Samsung-Electro-Mechanics-datasheet-11968064.pdf?src-supplier=Arrow+Electronics, ComponentLink11URL=https://datasheet.octopart.com:443/CL10A106KP8NNNC-Samsung-Electro-Mechanics-datasheet-11968064.pdf?src-supplier=Arrow+Electronics, ComponentLink12Description=https://datasheet.octopart.com:443/CL10A106KP8NNNC-Samsung-datasheet-8326407.pdf?src-supplier=TME, ComponentLink12URL=https://datasheet.octopart.com:443/CL10A106KP8NNNC-Samsung-datasheet-8326407.pdf?src-supplier=TME, Contact Plating=Tin, Depth=800µm, Height=800µm, Lead Free="Lead Free", Length=1.6mm, Lifecycle Status=Production, Manufacturer Part Number=CL10A106KP8NNNC, Material=Ceramic, Mounting Technology="Surface Mount", Number of Terminals=2, Pricing="1=0.08, 10=0.022 (USD)", Radiation Hardening=No, REACH SVHC=Yes, RoHS=Compliant, Schedule B="8532240020, 8532240020|8532240020|8532240020|8532240020|8532240020|8532240020|8532240020|8532240020|8532240020|8532240020|8532240020|8532240020|8532240020|8532240020|8532240020|8532240020|8532240020|8532240020|8532240020|8532240020|8532240020|8532240020|8532240020|85", Stock=1052975, Supplier=DigiKey, Thickness=889µm, Voltage Rating (DC)=10V, Width=800µm
C4: library part CL10A475KP8NNNC, "CAP CER 4.7UF 10V X5R 0603", Case Code (Imperial)=0603, Case Code (Metric)=1608, Dielectric=X5R, Dielectric Material=Ceramic, LCSC Part Number=C1705, Manufacturer="Samsung Electro-Mechanics", Max Operating Temperature=85°C, Min Operating Temperature=-55°C, Supplier Part Number=1276-1044-1-ND, Tolerance=10%, Voltage Rating=10V, Case/Package=0603, Category="Ceramic Capacitors", China RoHS=Compliant, ComponentLink1Description=https://datasheet.octopart.com:443/CL10A475KP8NNNC-Samsung-Electro-Mechanics-datasheet-141347107.pdf?src-supplier=IHS, ComponentLink1URL=https://datasheet.octopart.com:443/CL10A475KP8NNNC-Samsung-Electro-Mechanics-datasheet-141347107.pdf?src-supplier=IHS, ComponentLink2Description=https://datasheet.octopart.com/CL10A475KP8NNNC-Samsung-Electro-Mechanics-datasheet-8324245.pdf, ComponentLink2URL=https://datasheet.octopart.com/CL10A475KP8NNNC-Samsung-Electro-Mechanics-datasheet-8324245.pdf, ComponentLink3Description=https://datasheet.octopart.com/CL10A475KP8NNNC-Samsung-Electro-Mechanics-datasheet-97040617.pdf, ComponentLink3URL=https://datasheet.octopart.com/CL10A475KP8NNNC-Samsung-Electro-Mechanics-datasheet-97040617.pdf, ComponentLink4Description=https://datasheet.octopart.com/General-Multilayer-Ceramic-Capacitors-Samsung-datasheet-family-111.pdf, ComponentLink4URL=https://datasheet.octopart.com/General-Multilayer-Ceramic-Capacitors-Samsung-datasheet-family-111.pdf, ComponentLink5Description=https://datasheet.octopart.com:443/CL10A475KP8NNNC-Samsung-Electro-Mechanics-datasheet-110226306.pdf?src-supplier=Future+Electronics, ComponentLink5URL=https://datasheet.octopart.com:443/CL10A475KP8NNNC-Samsung-Electro-Mechanics-datasheet-110226306.pdf?src-supplier=Future+Electronics, ComponentLink6Description=https://datasheet.octopart.com:443/CL10A475KP8NNNC-Samsung-Electro-Mechanics-datasheet-81461812.pdf?src-supplier=Future+Electronics, ComponentLink6URL=https://datasheet.octopart.com:443/CL10A475KP8NNNC-Samsung-Electro-Mechanics-datasheet-81461812.pdf?src-supplier=Future+Electronics, ComponentLink7Description=https://datasheet.octopart.com:443/CL10A475KP8NNNC-Samsung-datasheet-44382860.pdf?src-supplier=Future+Electronics, ComponentLink7URL=https://datasheet.octopart.com:443/CL10A475KP8NNNC-Samsung-datasheet-44382860.pdf?src-supplier=Future+Electronics, ComponentLink8Description=https://datasheet.octopart.com:443/CL10A475KP8NNNC-Samsung-datasheet-26589134.pdf?src-supplier=Future+Electronics, ComponentLink8URL=https://datasheet.octopart.com:443/CL10A475KP8NNNC-Samsung-datasheet-26589134.pdf?src-supplier=Future+Electronics, ComponentLink9Description=https://datasheet.octopart.com:443/CL10A475KP8NNNC-Samsung-Electro-Mechanics-datasheet-149158807.pdf?src-supplier=Future+Electronics, ComponentLink9URL=https://datasheet.octopart.com:443/CL10A475KP8NNNC-Samsung-Electro-Mechanics-datasheet-149158807.pdf?src-supplier=Future+Electronics, ComponentLink10Description=https://datasheet.octopart.com:443/CL10A475KP8NNNC-Samsung-datasheet-59220082.pdf?src-supplier=TME, ComponentLink10URL=https://datasheet.octopart.com:443/CL10A475KP8NNNC-Samsung-datasheet-59220082.pdf?src-supplier=TME, ComponentLink11Description=https://datasheet.octopart.com:443/CL10A475KP8NNNC-Samsung-Electro-Mechanics-datasheet-11791968.pdf?src-supplier=Arrow+Electronics, ComponentLink11URL=https://datasheet.octopart.com:443/CL10A475KP8NNNC-Samsung-Electro-Mechanics-datasheet-11791968.pdf?src-supplier=Arrow+Electronics, ComponentLink12Description=http://sigma.octopart.com:80/rohs_certificate/General-Multilayer-Ceramic-Capacitors-Samsung-family-110.pdf?src-supplier=Compliance+Statements, ComponentLink12URL=http://sigma.octopart.com:80/rohs_certificate/General-Multilayer-Ceramic-Capacitors-Samsung-family-110.pdf?src-supplier=Compliance+Statements, ComponentLink13Description=http://sigma.octopart.com:80/rohs_statement/General-Multilayer-Ceramic-Capacitors-Samsung-family-132.pdf?src-supplier=Compliance+Statements, ComponentLink13URL=http://sigma.octopart.com:80/rohs_statement/General-Multilayer-Ceramic-Capacitors-Samsung-family-132.pdf?src-supplier=Compliance+Statements, ComponentLink14Description=http://sigma.octopart.com:80/reach_statement/General-Multilayer-Ceramic-Capacitors-Samsung-family-133.pdf?src-supplier=Compliance+Statements, ComponentLink14URL=http://sigma.octopart.com:80/reach_statement/General-Multilayer-Ceramic-Capacitors-Samsung-family-133.pdf?src-supplier=Compliance+Statements, Contact Plating=Tin, Depth=800µm, Height=800µm, Length=1.6mm, Lifecycle Status=Production, Manufacturer Part Number=CL10A475KP8NNNC, Material=Ceramic, Mounting Technology="Surface Mount", Number of Terminals=2, Pricing="1=0.08, 10=0.006 (USD)", Radiation Hardening=No, REACH SVHC=Yes, RoHS=Compliant, Schedule B="8532240020, 8532240020|8532240020|8532240020|8532240020|8532240020|8532240020|8532240020|8532240020|8532240020|8532240020|8532240020|8532240020|8532240020|8532240020|8532240020|8532240020|8532240020|8532240020|8532240020|8532240020|8532240020|8532240020|8532240020|85", Stock=4003618, Supplier=DigiKey, Thickness=889µm, Voltage Rating (DC)=10V, Width=800µm
C12 C14 C21: library part CL10A105KA8NNNC, "CAP CER 1UF 25V X5R 0603", Case Code (Imperial)=0603, Case Code (Metric)=1608, Dielectric=X5R, Dielectric Material=Ceramic, LCSC Part Number=C5673, Manufacturer="Samsung Electro-Mechanics", Max Operating Temperature=85°C, Min Operating Temperature=-55°C, Supplier Part Number=1276-1102-6-ND, Tolerance=10%, Voltage=25V, Case/Package=0603, Category="Ceramic Capacitors", China RoHS=Compliant, ComponentLink1Description=https://datasheet.octopart.com:443/CL10A105KA8NNNC-Samsung-Electro-Mechanics-datasheet-136031742.pdf?src-supplier=IHS, ComponentLink1URL=https://datasheet.octopart.com:443/CL10A105KA8NNNC-Samsung-Electro-Mechanics-datasheet-136031742.pdf?src-supplier=IHS, ComponentLink2Description=https://datasheet.octopart.com:443/CL10A105KA8NNNC-Samsung-datasheet-8328790.pdf?src-supplier=TME, ComponentLink2URL=https://datasheet.octopart.com:443/CL10A105KA8NNNC-Samsung-datasheet-8328790.pdf?src-supplier=TME, ComponentLink3Description=https://datasheet.octopart.com:443/CL10A105KA8NNNC-Samsung-datasheet-22147431.pdf?src-supplier=TME, ComponentLink3URL=https://datasheet.octopart.com:443/CL10A105KA8NNNC-Samsung-datasheet-22147431.pdf?src-supplier=TME, ComponentLink4Description=https://datasheet.octopart.com:443/CL10A105KA8NNNC-Samsung-Electro-Mechanics-datasheet-110326820.pdf?src-supplier=Future+Electronics, ComponentLink4URL=https://datasheet.octopart.com:443/CL10A105KA8NNNC-Samsung-Electro-Mechanics-datasheet-110326820.pdf?src-supplier=Future+Electronics, ComponentLink5Description=https://datasheet.octopart.com:443/CL10A105KA8NNNC-Samsung-Electro-Mechanics-datasheet-81461776.pdf?src-supplier=Future+Electronics, ComponentLink5URL=https://datasheet.octopart.com:443/CL10A105KA8NNNC-Samsung-Electro-Mechanics-datasheet-81461776.pdf?src-supplier=Future+Electronics, ComponentLink6Description=https://datasheet.octopart.com:443/CL10A105KA8NNNC-Samsung-datasheet-42485231.pdf?src-supplier=Future+Electronics, ComponentLink6URL=https://datasheet.octopart.com:443/CL10A105KA8NNNC-Samsung-datasheet-42485231.pdf?src-supplier=Future+Electronics, ComponentLink7Description=https://datasheet.octopart.com:443/CL10A105KA8NNNC-Samsung-datasheet-26589109.pdf?src-supplier=Future+Electronics, ComponentLink7URL=https://datasheet.octopart.com:443/CL10A105KA8NNNC-Samsung-datasheet-26589109.pdf?src-supplier=Future+Electronics, ComponentLink8Description=https://datasheet.octopart.com:443/CL10A105KA8NNNC-Samsung-Electro-Mechanics-datasheet-149156475.pdf?src-supplier=Future+Electronics, ComponentLink8URL=https://datasheet.octopart.com:443/CL10A105KA8NNNC-Samsung-Electro-Mechanics-datasheet-149156475.pdf?src-supplier=Future+Electronics, ComponentLink9Description=https://datasheet.octopart.com/CL10A105KA8NNNC-Samsung-Electro-Mechanics-datasheet-97040617.pdf, ComponentLink9URL=https://datasheet.octopart.com/CL10A105KA8NNNC-Samsung-Electro-Mechanics-datasheet-97040617.pdf, ComponentLink10Description=https://datasheet.octopart.com/CL10A105KA8NNNC-Samsung-Electro-Mechanics-datasheet-8324245.pdf, ComponentLink10URL=https://datasheet.octopart.com/CL10A105KA8NNNC-Samsung-Electro-Mechanics-datasheet-8324245.pdf, ComponentLink11Description=https://datasheet.octopart.com/General-Multilayer-Ceramic-Capacitors-Samsung-datasheet-family-111.pdf, ComponentLink11URL=https://datasheet.octopart.com/General-Multilayer-Ceramic-Capacitors-Samsung-datasheet-family-111.pdf, ComponentLink12Description=http://sigma.octopart.com:80/rohs_certificate/General-Multilayer-Ceramic-Capacitors-Samsung-family-110.pdf?src-supplier=Compliance+Statements, ComponentLink12URL=http://sigma.octopart.com:80/rohs_certificate/General-Multilayer-Ceramic-Capacitors-Samsung-family-110.pdf?src-supplier=Compliance+Statements, ComponentLink13Description=http://sigma.octopart.com:80/rohs_statement/General-Multilayer-Ceramic-Capacitors-Samsung-family-132.pdf?src-supplier=Compliance+Statements, ComponentLink13URL=http://sigma.octopart.com:80/rohs_statement/General-Multilayer-Ceramic-Capacitors-Samsung-family-132.pdf?src-supplier=Compliance+Statements, ComponentLink14Description=http://sigma.octopart.com:80/reach_statement/General-Multilayer-Ceramic-Capacitors-Samsung-family-133.pdf?src-supplier=Compliance+Statements, ComponentLink14URL=http://sigma.octopart.com:80/reach_statement/General-Multilayer-Ceramic-Capacitors-Samsung-family-133.pdf?src-supplier=Compliance+Statements, Contact Plating=Tin, Depth=800µm, Height=800µm, Lead Free="Lead Free", Length=1.6mm, Lifecycle Status=Production, Manufacturer Part Number=CL10A105KA8NNNC, Material=Ceramic, Mounting Technology="Surface Mount", Number of Terminals=2, Pricing="1=0.08, 10=0.005, 50=0.0044, 100=0.0043 (USD)", Radiation Hardening=No, REACH SVHC=Yes, RoHS=Compliant, Schedule B="8532240020, 8532240020|8532240020|8532240020|8532240020|8532240020|8532240020|8532240020|8532240020|8532240020|8532240020|8532240020|8532240020|8532240020|8532240020|8532240020|8532240020|8532240020|8532240020|8532240020|8532240020|8532240020|8532240020|8532240020|85", Stock=788704, Supplier=DigiKey, Thickness=889µm, Voltage Rating=25V, Voltage Rating (DC)=25V, Width=800µm
C15 C16 C17 C18: library part CL10B102KB85PNL, "CAP CER 1nF 50V X7R 0603", Case/Package=0603, Dielectric=X7R, Dielectric Material=Ceramic, LCSC Part Number=C16194451, Manufacturer="Samsung Electro-Mechanics", Max Operating Temperature=125°C, Min Operating Temperature=-55°C, Supplier Part Number=1276-6991-1-ND, Tolerance=10%, Voltage Rating=50V, Category="Ceramic Capacitors", China RoHS=Compliant, ComponentLink1Description=https://datasheet.octopart.com:443/CL10B102KB85PNL-Samsung-Electro-Mechanics-datasheet-140815171.pdf?src-supplier=IHS, ComponentLink1URL=https://datasheet.octopart.com:443/CL10B102KB85PNL-Samsung-Electro-Mechanics-datasheet-140815171.pdf?src-supplier=IHS, ComponentLink2Description=https://datasheet.octopart.com:443/CL10B102KB85PNL-Samsung-Electro-Mechanics-datasheet-176142735.pdf?src-supplier=Newark, ComponentLink2URL=https://datasheet.octopart.com:443/CL10B102KB85PNL-Samsung-Electro-Mechanics-datasheet-176142735.pdf?src-supplier=Newark, ComponentLink3Description=https://datasheet.octopart.com:443/CL10B102KB85PNL-Samsung-Electro-Mechanics-datasheet-11803267.pdf?src-supplier=Arrow+Electronics, ComponentLink3URL=https://datasheet.octopart.com:443/CL10B102KB85PNL-Samsung-Electro-Mechanics-datasheet-11803267.pdf?src-supplier=Arrow+Electronics, ComponentLink4Description=https://datasheet.octopart.com:443/CL10B102KB85PNL-Samsung-datasheet-59220082.pdf?src-supplier=TME, ComponentLink4URL=https://datasheet.octopart.com:443/CL10B102KB85PNL-Samsung-datasheet-59220082.pdf?src-supplier=TME, Depth=800µm, Height=800µm, Length=1.6mm, Lifecycle Status=NRND, Manufacturer Part Number=CL10B102KB85PNL, Material=Ceramic, Mounting Technology="Surface Mount", Number of Terminals=2, Packaging="Tape and Reel", Pricing="1=0.09, 10=0.029, 50=0.09, 100=0.0165, 500=0.0118, 1000=0.01036, 2500=0.00884, 5000=0.00793 (EUR)", Radiation Hardening=No, REACH SVHC=Yes, RoHS=Compliant, Schedule B="8532240020, 8532240020|8532240020|8532240020|8532240020|8532240020", Stock=171523, Supplier=DigiKey, Voltage Rating (DC)=50V, Width=800µm
D1 D2 D3 D4 D5: "TVS DIODE 5.3VWM 12VC SOD882", Case/Package=SOD-882-2, Clamping Voltage=12V, LCSC Part Number=C126840, Leakage Current=100nA, Manufacturer=Littelfuse, Max Breakdown Voltage=9V, Max Operating Temperature=125°C, Max Power Dissipation=20W, Max Surge Current=3A, Min Breakdown Voltage=6.8V, Min Operating Temperature=-40°C, Peak Pulse Current=1A, Power Line Protection=No, Reverse Standoff Voltage=5.3V, Supplier Part Number=F6709CT-ND, Category="TVS Diodes", ComponentLink1Description=https://datasheet.octopart.com:443/SP3022-01ETG-Littelfuse-datasheet-180609637.pdf?src-supplier=IHS, ComponentLink1URL=https://datasheet.octopart.com:443/SP3022-01ETG-Littelfuse-datasheet-180609637.pdf?src-supplier=IHS, ComponentLink2Description=https://datasheet.octopart.com:443/SP3022-01ETG-Littelfuse-datasheet-181956538.pdf?src-supplier=Newark, ComponentLink2URL=https://datasheet.octopart.com:443/SP3022-01ETG-Littelfuse-datasheet-181956538.pdf?src-supplier=Newark, ComponentLink3Description=https://datasheet.octopart.com:443/SP3022-01ETG-Littelfuse-datasheet-43876386.pdf?src-supplier=Newark, ComponentLink3URL=https://datasheet.octopart.com:443/SP3022-01ETG-Littelfuse-datasheet-43876386.pdf?src-supplier=Newark, ComponentLink4Description=https://datasheet.octopart.com:443/SP3022-01ETG-Littelfuse-datasheet-140480403.pdf?src-supplier=ODG+(Origin+Data+Global), ComponentLink4URL=https://datasheet.octopart.com:443/SP3022-01ETG-Littelfuse-datasheet-140480403.pdf?src-supplier=ODG+(Origin+Data+Global), ComponentLink5Description=https://datasheet.octopart.com:443/SP3022-01ETG-Littelfuse-datasheet-82968918.pdf?src-supplier=element14+APAC, ComponentLink5URL=https://datasheet.octopart.com:443/SP3022-01ETG-Littelfuse-datasheet-82968918.pdf?src-supplier=element14+APAC, ComponentLink6Description=https://datasheet.octopart.com:443/SP3022-01ETG-Littelfuse-datasheet-175469626.pdf?src-supplier=Future+Electronics, ComponentLink6URL=https://datasheet.octopart.com:443/SP3022-01ETG-Littelfuse-datasheet-175469626.pdf?src-supplier=Future+Electronics, ComponentLink7Description=https://datasheet.octopart.com:443/SP3022-01ETG-Littelfuse-datasheet-100434945.pdf?src-supplier=Future+Electronics, ComponentLink7URL=https://datasheet.octopart.com:443/SP3022-01ETG-Littelfuse-datasheet-100434945.pdf?src-supplier=Future+Electronics, Composition=Zener, Lifecycle Status=Production, Manufacturer Part Number=SP3022-01ETG, Mounting Technology="Surface Mount", Number of Bidirectional Channels=1, Number of Channels=1, Number of Elements=1, Number of Terminals=2, Peak Pulse Power=20W, Pins=2, Polarity=Bidirectional, Pricing="1=0.15, 10=0.105 (EUR)", REACH SVHC=Yes, RoHS=Compliant, Stock=68383, Supplier=DigiKey, Termination=SMD/SMT, Working Voltage=5.3V
D7: library part VLMG1500-GS08, "LED YLW-GRN 0402 SMD", Ambient Temperature Range High=85°C, Case Code (Imperial)=0402, Case Code (Metric)=1005, Color="Green, Yellow", Forward Current=30mA, Forward Voltage=2.4V, Illumination Color=Green, LCSC Part Number=C511404, Lens Color=Clear, Manufacturer=Vishay, Min Operating Temperature=-30°C, Power Dissipation=75mW, Reverse Voltage=5V, Supplier Part Number=VLMG1500-GS08DKR-ND, Test Current=20mA, Case/Package=0402, Category=LEDs, ComponentLink1Description=https://datasheet.octopart.com:443/VLMG1500-GS08-Vishay-datasheet-181477802.pdf?src-supplier=IHS, ComponentLink1URL=https://datasheet.octopart.com:443/VLMG1500-GS08-Vishay-datasheet-181477802.pdf?src-supplier=IHS, ComponentLink2Description=https://datasheet.octopart.com:443/VLMG1500-GS08-Vishay-datasheet-21227148.pdf?src-supplier=element14+APAC, ComponentLink2URL=https://datasheet.octopart.com:443/VLMG1500-GS08-Vishay-datasheet-21227148.pdf?src-supplier=element14+APAC, ComponentLink3Description=https://datasheet.octopart.com:443/VLMG1500-GS08-Vishay-datasheet-33014519.pdf?src-supplier=element14+APAC, ComponentLink3URL=https://datasheet.octopart.com:443/VLMG1500-GS08-Vishay-datasheet-33014519.pdf?src-supplier=element14+APAC, ComponentLink4Description=https://datasheet.octopart.com:443/VLMG1500-GS08-Vishay-datasheet-62332426.pdf?src-supplier=Newark, ComponentLink4URL=https://datasheet.octopart.com:443/VLMG1500-GS08-Vishay-datasheet-62332426.pdf?src-supplier=Newark, ComponentLink5Description=https://datasheet.octopart.com:443/VLMG1500-GS08-Vishay-datasheet-102762782.pdf?src-supplier=Future+Electronics, ComponentLink5URL=https://datasheet.octopart.com:443/VLMG1500-GS08-Vishay-datasheet-102762782.pdf?src-supplier=Future+Electronics, ComponentLink6Description=https://datasheet.octopart.com:443/VLMG1500-GS08-Vishay-datasheet-68326145.pdf?src-supplier=TME, ComponentLink6URL=https://datasheet.octopart.com:443/VLMG1500-GS08-Vishay-datasheet-68326145.pdf?src-supplier=TME, ComponentLink7Description=http://sigma.octopart.com:80/rohs_statement/Vishay-company-15.pdf?src-supplier=Compliance+Statements, ComponentLink7URL=http://sigma.octopart.com:80/rohs_statement/Vishay-company-15.pdf?src-supplier=Compliance+Statements, Depth=500µm, Dominant Wavelength=571nm, Height=350µm, Lead Free="Lead Free", Length=1mm, Lens Style=Rectangular, Lifecycle Status=Production, Luminous Intensity=18mcd, Manufacturer Part Number=VLMG1500-GS08, Max Operating Temperature=85°C, Mounting Technology="Surface Mount", Number of Circuits=1, Number of Elements=1, Number of LEDs=1, Number of Terminals=2, Packaging="Cut Tape", Peak Wavelength=571nm, Pins=2, Power Rating=75mW, Pricing="1=0.2, 10=0.14, 100=0.2, 500=0.07856, 1000=0.07219 (EUR)", Radiation Hardening=No, REACH SVHC=Yes, RoHS=Compliant, Schedule B="8541402000, 8541402000|8541402000|8541402000|8541402000|8541402000", Shape=Rectangular, Stock=249321, Supplier=DigiKey, Terminal Pitch=675µm, Viewing Angle=130°, Wavelength=571nm, Width=500µm
J1 J2: "CONN RCP USB2.0 TYP C 24P SMD RA", Contact Resistance=50mΩ, Current Rating=1.25A, Dielectric Material=Polyamide, Insulation Resistance=100MΩ, LCSC Part Number=C3197684, Manufacturer=Molex, Max Operating Temperature=85°C, Min Operating Temperature=-40°C, Supplier Part Number=900-2171790001CT-ND, Voltage Rating=30V, Category="USB Connectors", ComponentLink1Description=https://datasheet.octopart.com:443/217179-0001-Molex-datasheet-158871109.pdf?src-supplier=ODG+(Origin+Data+Global), ComponentLink1URL=https://datasheet.octopart.com:443/217179-0001-Molex-datasheet-158871109.pdf?src-supplier=ODG+(Origin+Data+Global), ComponentLink2Description=https://sigma.octopart.com:443/158871110/technical_drawing/Molex-217179-0001.pdf?src-supplier=Upverter, ComponentLink2URL=https://sigma.octopart.com:443/158871110/technical_drawing/Molex-217179-0001.pdf?src-supplier=Upverter, ComponentLink3Description=https://datasheet.octopart.com:443/217179-0001-Molex-datasheet-164573281.pdf?src-supplier=RS+(Formerly+Allied+Electronics), ComponentLink3URL=https://datasheet.octopart.com:443/217179-0001-Molex-datasheet-164573281.pdf?src-supplier=RS+(Formerly+Allied+Electronics), ComponentLink4Description=http://sigma.octopart.com:80/conflict_mineral_statement/Molex-company-72.pdf?src-supplier=Compliance+Statements, ComponentLink4URL=http://sigma.octopart.com:80/conflict_mineral_statement/Molex-company-72.pdf?src-supplier=Compliance+Statements, ComponentLink5Description=http://sigma.octopart.com:80/rohs_statement/Molex-company-73.pdf?src-supplier=Compliance+Statements, ComponentLink5URL=http://sigma.octopart.com:80/rohs_statement/Molex-company-73.pdf?src-supplier=Compliance+Statements, ComponentLink6Description=http://sigma.octopart.com:80/reach_statement/Molex-company-74.pdf?src-supplier=Compliance+Statements, ComponentLink6URL=http://sigma.octopart.com:80/reach_statement/Molex-company-74.pdf?src-supplier=Compliance+Statements, Contact Gender=Female, Contact Material="Gold, Nickel", Gender=Receptacle, Height=3.36mm, Lifecycle Status=Production, Manufacturer Part Number=217179-0001, Number of Contacts=16, Number of Ports=1, Number of Rows=1, Pins=16, Pricing="1=0.83, 10=0.704, 25=0.6596, 50=0.628, 100=0.598, 250=0.56052, 500=0.53374, 1200=0.50175, 2400=0.4778, 3600=0.46433, 6000=0.4479, 8400=0.4374, 12000=0.42654 (USD)", REACH SVHC=Yes, RoHS=Compliant, Shell Finish=Nickel, Shell Material="Stainless Steel", Stock=5092, Supplier=DigiKey, Terminal Pitch=500µm, USB Standard="USB 2.0"
J3: "CONN HEADER VERT 3POS 1.27MM", Contact Resistance=20mΩ, Current Rating=1A, Dielectric Material=Polyamide, Insulation Resistance=5GΩ, LCSC Part Number=C41427056, Manufacturer=Sullins, Max Operating Temperature=105°C, Min Operating Temperature=-40°C, Supplier Part Number=S9014E-03-ND, Category="Card Edge Connectors", ComponentLink1Description=https://datasheet.octopart.com:443/GRPB031VWVN-RC-Sullins-datasheet-181250435.pdf?src-supplier=IHS, ComponentLink1URL=https://datasheet.octopart.com:443/GRPB031VWVN-RC-Sullins-datasheet-181250435.pdf?src-supplier=IHS, ComponentLink2Description=https://datasheet.octopart.com:443/GRPB031VWVN-RC-Sullins-datasheet-138898432.pdf?src-supplier=ODG+(Origin+Data+Global), ComponentLink2URL=https://datasheet.octopart.com:443/GRPB031VWVN-RC-Sullins-datasheet-138898432.pdf?src-supplier=ODG+(Origin+Data+Global), ComponentLink3Description=https://datasheet.octopart.com:443/GRPB031VWVN-RC-Sullins-datasheet-34148777.pdf?src-supplier=Future+Electronics, ComponentLink3URL=https://datasheet.octopart.com:443/GRPB031VWVN-RC-Sullins-datasheet-34148777.pdf?src-supplier=Future+Electronics, ComponentLink4Description=https://datasheet.octopart.com:443/GRPB031VWVN-RC-Sullins-datasheet-12514290.pdf?src-supplier=Future+Electronics, ComponentLink4URL=https://datasheet.octopart.com:443/GRPB031VWVN-RC-Sullins-datasheet-12514290.pdf?src-supplier=Future+Electronics, Connector Type="Male Pin", Contact Gender=Male, Contact Mating Length=2.9972mm, Contact Plating=Gold, Lead Free="Lead Free", Lifecycle Status=Production, Manufacturer Part Number=GRPB031VWVN-RC, Mounting Technology="Through Hole", Number of Positions=3, Number of Rows=1, Packaging=Bulk, Pins=3, Pitch=1.27mm, Pricing="1=0.19, 10=0.164, 100=0.1391, 500=0.12416, 1000=0.11822, 5000=0.10552, 10000=0.10048 (USD)", REACH SVHC=Yes, RoHS=Compliant, Stock=52349, Supplier=DigiKey, Terminal Pitch=1.27mm, Termination=Solder
J4: library part HS-HS96L03W2C03-OLED, "HS HS96L03W2C03 i2c OLED screen"